# Altium PCB 014_TTL_inverter.PcbDoc
Units mil, origin at the board's own origin, x right, y up, seen from the top; angles counter-clockwise.
Board outline 6000 x 4000 mil, 2 copper layers (Top Layer, Bottom Layer); 6 components, 5 nets, 19 pads, 0 vias.
Unrouted connection lines stored in the file: 8.
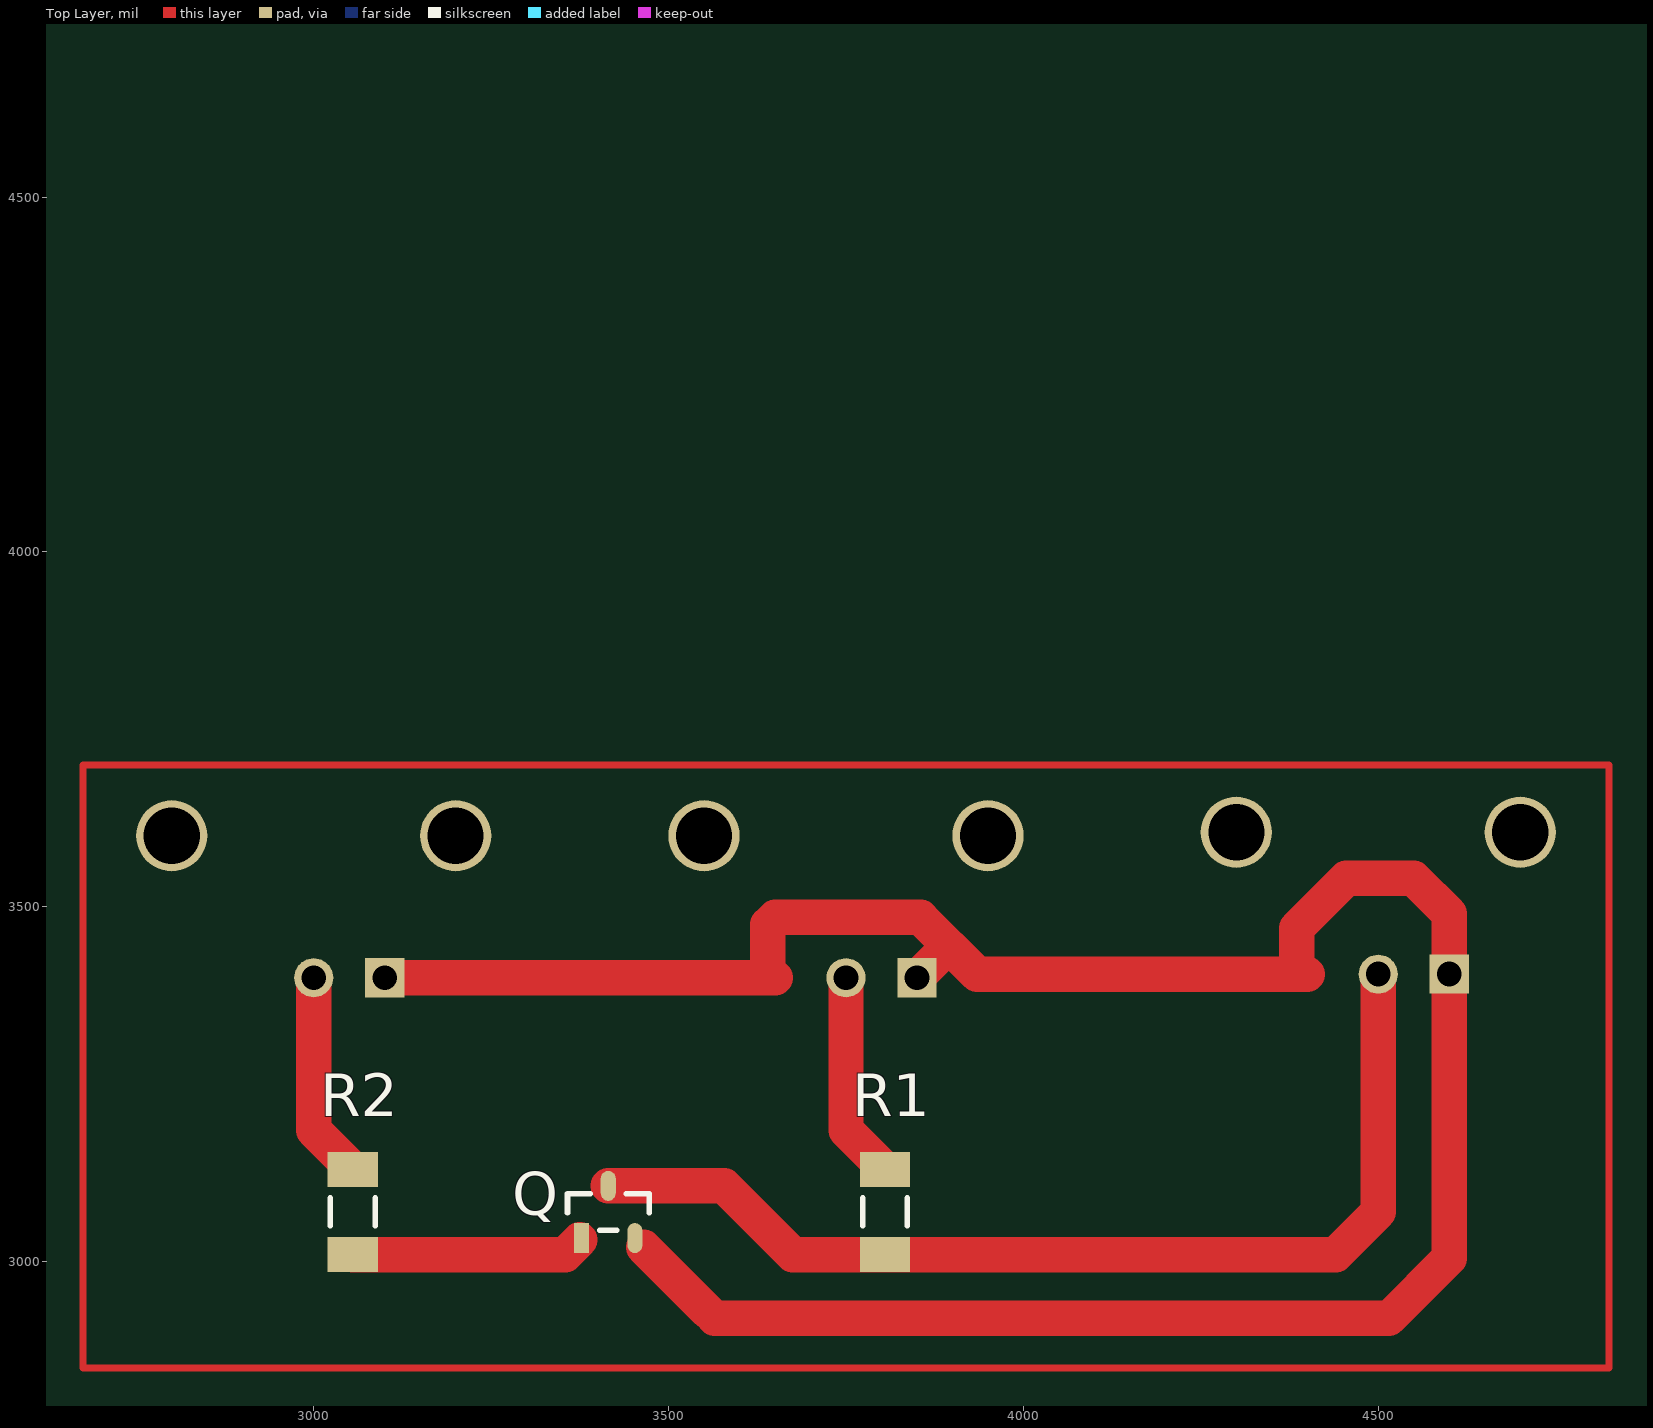
[diagram p0: Top Layer view]
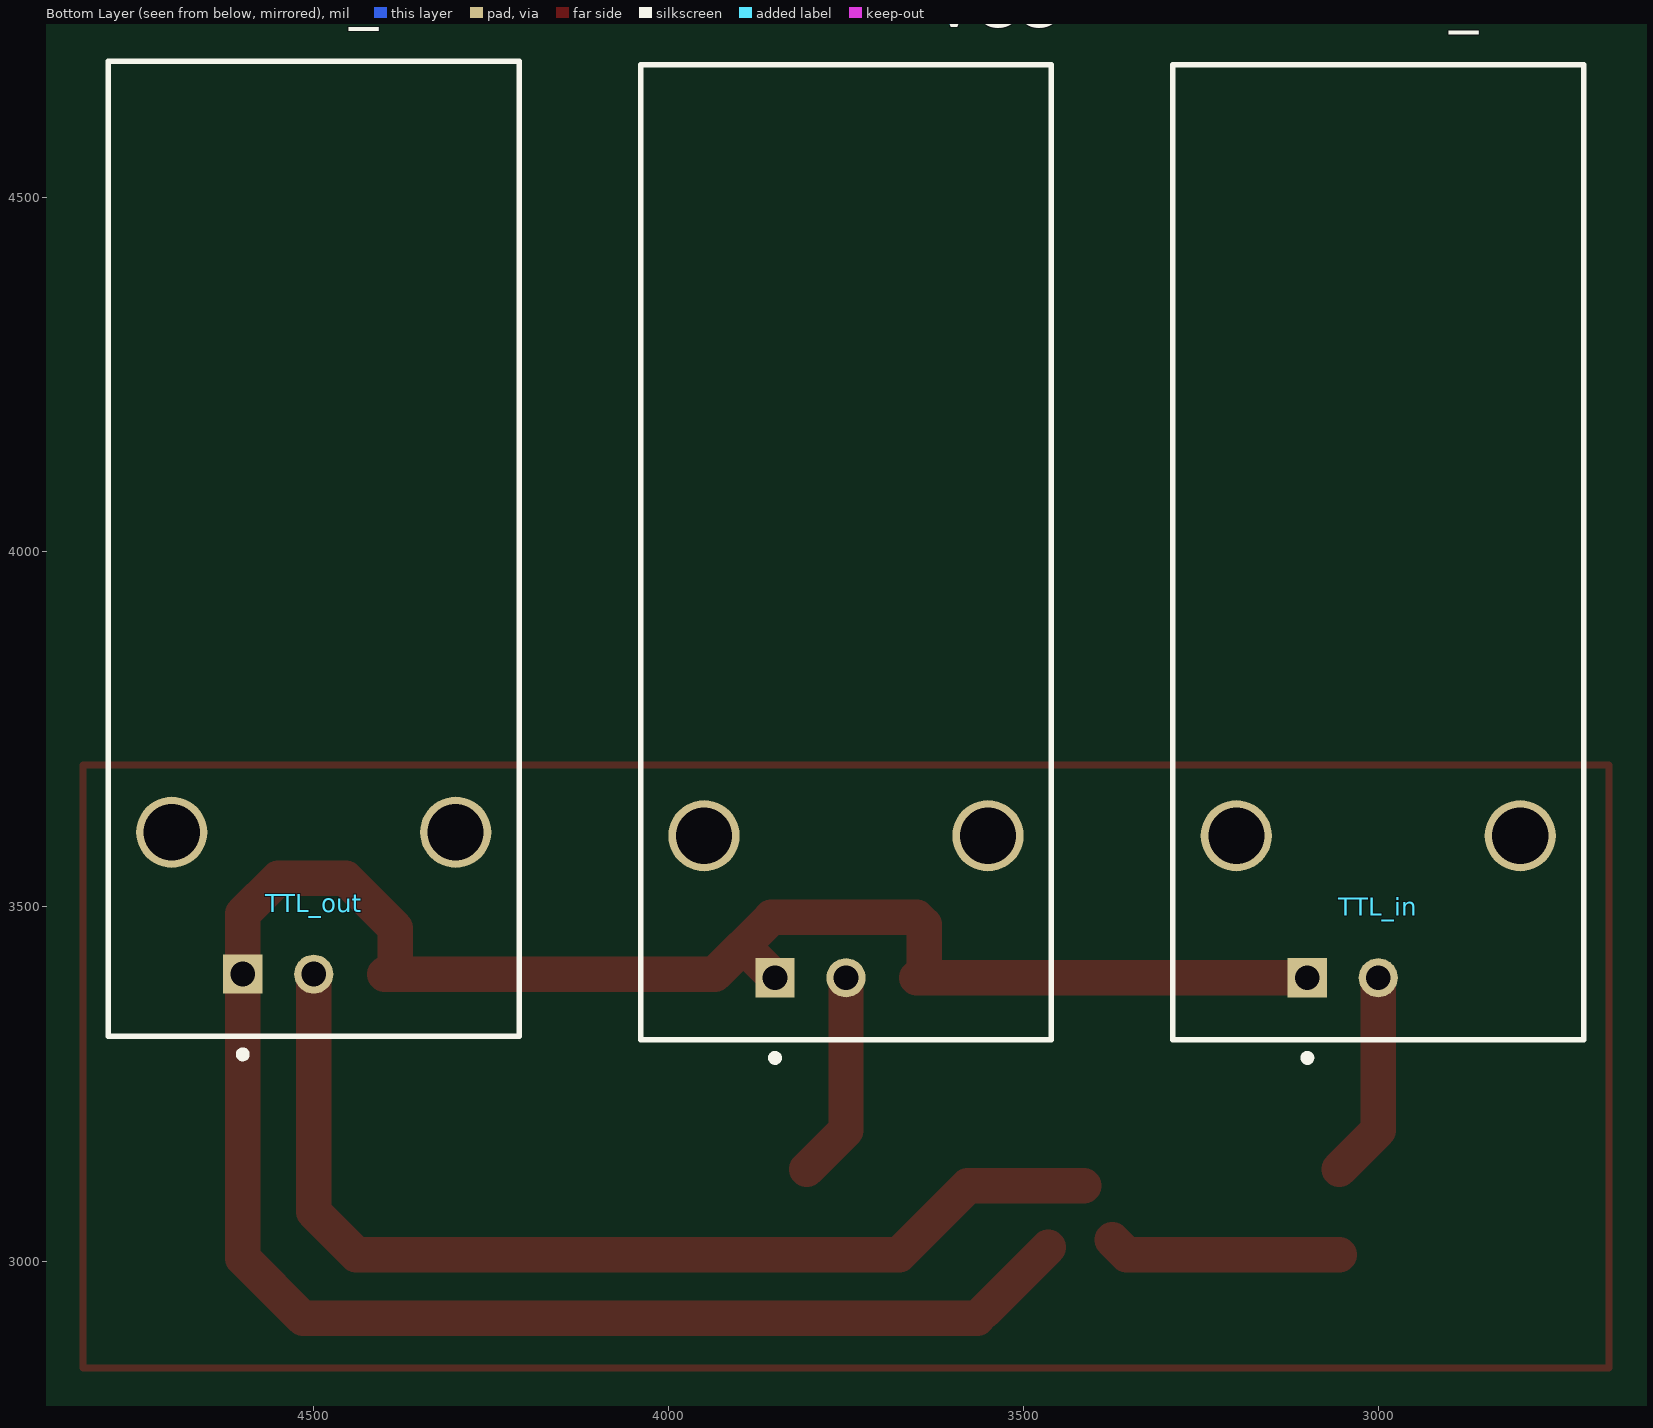
[diagram p1: Bottom Layer view, seen from below]

## Layer stack, top to bottom
Top Solder: solder mask 0.4, Solder Resist, Dk 3.5
Top Layer: signal copper 1.4
Dielectric 1: dielectric 12.6, FR-4, Dk 4.8
Bottom Layer: signal copper 1.4
Bottom Solder: solder mask 0.4, Solder Resist, Dk 3.5

## Board outline
1000,1000 7000,1000 7000,5000 1000,5000

## Design rules (kind name [scope] priority, off if disabled: settings)
Clearance [All] p1: gap=10 ignorepadtopadclearanceinfootprint=FALSE except(0: Arc-Hole Track-Hole SMDPad-Hole THPad-Hole Via-Hole Fill-Hole Poly-Hole Region-Hole Text-Hole)
PolygonConnect [All] p1: connectstyle=Relief reliefconductorwidth=10 reliefentries=4 polygonreliefangle="90 Angle" airgapwidth=10
RoutingVias [All] p1: holewidth=28 width=50 viastyle="Through Hole" minholewidth=28 minwidth=50 maxholewidth=28 maxwidth=50
SolderMaskExpansion [All] p1: expansion=4 istentingtop=FALSE
Width [All] p1: maxlimit=10 minlimit=10 preferedwidth=10
30 further rules are at their usual default settings.

## Components (designator, comment, footprint, x,y, rotation, side; value= is the part's Value field where it differs from the comment)
Q "NDS355AN" FP-527AG-01-IPC_C 3415,3070 r90 top
R1 "RC1206FR-0710KL" RESC3116X65X40ML10T20 3805,3070 r90 top
R2 "RC1206FR-0710KL" RESC3116X65X40ML10T20 3055,3070 r90 top
TTL_in "1-1337543-0" TECO-1-1337543-0_V 3000,3600 r180 bottom
TTL_out "1-1337543-0" TECO-1-1337543-0_V 4500,3605 r180 bottom
VCC "1-1337543-0" TECO-1-1337543-0_V 3750,3600 r180 bottom

## Footprints (in the part's own frame and the unit in brackets; to place one, negate y for a bottom-side part, rotate by r counter-clockwise, add the part's x,y. Pads: shape width x height; smd on the part's side, far side on the other; paste and mask are expansions set on the pad)
FP-527AG-01-IPC_C [mm]
  rect 1.075x0.538 smd paste+0 mask+0: 1(-0.935,0.95)
  rrect100% 1.075x0.538 smd paste+0 mask+0: 2(-0.935,-0.95) 3(0.935,0)
  silkscreen extent -0.65,-1.46 0.65,1.46, body extent -1.57,-1.56 1.57,1.56, height 0.25
RESC3116X65X40ML10T20 [mm] "Chip Resistor, 2-Leads, Body 3.10x1.60mm, IPC Low Density"
  rect 1.25x1.8 smd: 1(-1.525,0) 2(1.525,0)
  silkscreen extent -0.5,-0.8 0.5,0.8, body extent -1.6,-0.85 1.6,0.85, height 0.65
TECO-1-1337543-0_V [mm] "SMD, 2-Leads, Body 34.9x14.7mm, Pitch 2.54mm"
  rect 1.4x1.4 hole 0.89: 1(-2.54,-5.08)
  round 1.4 hole 0.89: 2(0,-5.08)
  round 2.55 hole 2.01: MH1(-5.08,0) MH2(5.08,0)
  silkscreen extent -7.35,-8.07 7.35,27.6, body extent -7.35,-7.1 7.35,28.05, height 15.8

## Part data
Q: library part CMP-2000-06834-2, "MOSFET N-CH 30V 1.7A SSOT3", Continuous Drain Current=1.7A, Drain to Source Breakdown Voltage=30V, Drain to Source Resistance=0.105Ω, Gate To Source Voltage=20V, Input Capacitace At Vds="195pF @ 15V", Manufacturer="ON Semiconductor", Max Forward Diode Voltage=1.2V, Max Junction Temp=+150°C, Package=527AG-01, Power Dissipation=0.46W, Pulse Drain Current=10A, Temperature="-55°C to +150°C", Temperature Range Low=-55°C, Typ Forward Diode Voltage=0.8V, Automotive=No, Category=Trans, ComponentLink2Description=Datasheet, ComponentLink2URL=https://www.onsemi.com/pub/Collateral/NDS355AN-D.PDF, Depletion Mode=False, Device Class L1="Discrete Semiconductors", Device Class L2=Transistors, Device Class L3=MOSFETs, Digikey Description="MOSFET N-CH 30V 1.7A SSOT3", Drain To Source Voltage=30V, Footprint Url=https://www.onsemi.com/pub/Collateral/527AG.PDF, Gate Charge At Vgs="3.5nC @ 5V", Height=1.22mm, Lead Free=Yes, Manufacturer Part Number=NDS355AN, Mouser Description="MOSFET SOT-23 N-CH LOGIC", Number of Channels=1, Number Of N Channels=1, Octopart=https://octopart.com/nds355an-on+semiconductor-84330922, RoHS=TRUE, Rthja Max=250°C/W, Standoff Height=0.013mm, Temperature Range High=+150°C, Threshold Vgs Max=2V, Threshold Vgs Min=1V, Transconductance=3.5S, Turn Off Delay Time=13ns, Turn On Delay Time=10ns
R1 R2: library part CMP-1014-00623-2, "Chip Resistor, 10 KOhm, +/- 1%, 0.25 W, -55 to 155 degC, 1206 (3216 Metric), RoHS, Tape and Reel", Case Code (Imperial)=1206, Case Code (Metric)=3216, Manufacturer=Yageo, Max Operating Temperature=155degC, Min Operating Temperature=-55degC, Package Description="2-Pin Surface Mount Device, Body 3.1 x 1.6 mm", Package Quantity=5000, Package Reference=1206.0, Power Rating=250mW, Resistance=10KOhm, Temperature Coefficient=100ppm/degreesC, Tolerance=1%, Voltage Rating=200V, Case/Package=1206, Composition=ThickFilm, Datasheet URL=http://www.yageo.com/NewPortal/yageodocoutput?fileName=/pdf/R-Chip/PYu-RC_Group_51_RoHS_L_5.pdf, Datasheet Version="Rev. 5, 10/2016", Depth=1.6mm, Height=0.55mm, Lead Free=LeadFree, Length=3.1mm, Manufacturer URL=http://www.yageo.com/, Military Standard=Not, Packaging=TapeandReel, REACH SVHC=Unknown, RoHSCompliant=true, Termination=SMD/SMT, Width=1.6mm
TTL_in TTL_out VCC: library part CMP-2000-05853-1, "Female Connector, Pitch 2.54 mm, 1 x 2 Position, Height 15.8 mm, Tail Length 3.8 mm,  / -55 to 85 degC, RoHS, Bulk", Frequency Max=4GHz, Manufacturer="TE Connectivity", Package Description="Female Connector, Pitch 2.54 mm, 1 x 2 Position, Height 15.8 mm, Tail Length 3.8 mm", Coaxial Cable Types=-, Coaxial Termination=Solder, Connector Body Style=RightAngleJack, Connector Mounting=PCBMount, Connector Type=BNCCoaxial, Contact Material=Brass, Contact Plating=GoldPlatedContacts, Datasheet URL=http://www.te.com/commerce/DocumentDelivery/DDEController?Action=showdoc&DocId=Customer+Drawing%7F1337543%7FG%7Fpdf%7FEnglish%7FENG_CD_1337543_G.pdf%7F1-1337543-0, Datasheet Version="Rev. G, 12/2012", Impedance=50ohm, Manufacturer URL=http://www.te.com/, Mounting Technology=ThroughHole, Package Reference=1-1337543-0, Product Range=-, SVHC=ToBeAdvised

## Nets (pads, with @x,y where several pads share a name; then routed paths per layer and width w, separated by ;. In a path a pad name is that pad's centre, name@x,y a point inside that pad or via, vN(x,y) a via of type N, cw(c..) or ccw(c..) an arc to the next point about the centre after c; other vN are vias at no path point)
GND: Q.2 TTL_in.1 TTL_out.1 VCC.1
NetQ_1: Q.1 R2.1
NetQ_3: Q.3 R1.1 TTL_out.2
NetR1_2: R1.2 VCC.2
NetR2_2: R2.2 TTL_in.2
pads on no net: TTL_in.MH1 TTL_in.MH2 TTL_out.MH1 TTL_out.MH2 VCC.MH1 VCC.MH2
copper on no net: | length 11951.2
  Top Layer w10: 2675,2850 4825,2850 4825,3700 2675,3700 2675,2850
  Top Layer w50: 3000,3400 3000,3185.04 3055,3130.04 ; 3055,3009.96 3354.37,3009.96 3375,3030.59 ; 3100,3400 3250,3400 ; 3215,3400 3650,3400 3640,3410 3640,3475 3650,3485 3855,3485 3935,3405 4400,3405 ; 3415,3106.81 3578.19,3106.81 3675.04,3009.96 3805,3009.96 4099.96,3009.96 ; 3465,3020 3555,2930 ; 3565,2920 4515,2920 4600,3005 4600,3405 4600,3490 4550,3540 4455,3540 4385,3470 4385,3420 ; 3750,3400 3750,3185.04 3805,3130.04 ; 3850,3400 3895,3445 ; 4070,3010 4440,3010 4500,3070 4500,3405